# Altium PCB SV06.PcbDoc (part 1 of 3)
Units mil, origin at the board's own origin, x right, y up, seen from the top; angles counter-clockwise.
Board outline 3960.63 x 2763.78 mil, 2 copper layers (Top, Bottom), stack 12.7 mil thick; 211 components, 173 nets, 726 pads, 644 vias.
Unrouted connection lines stored in the file: 411.
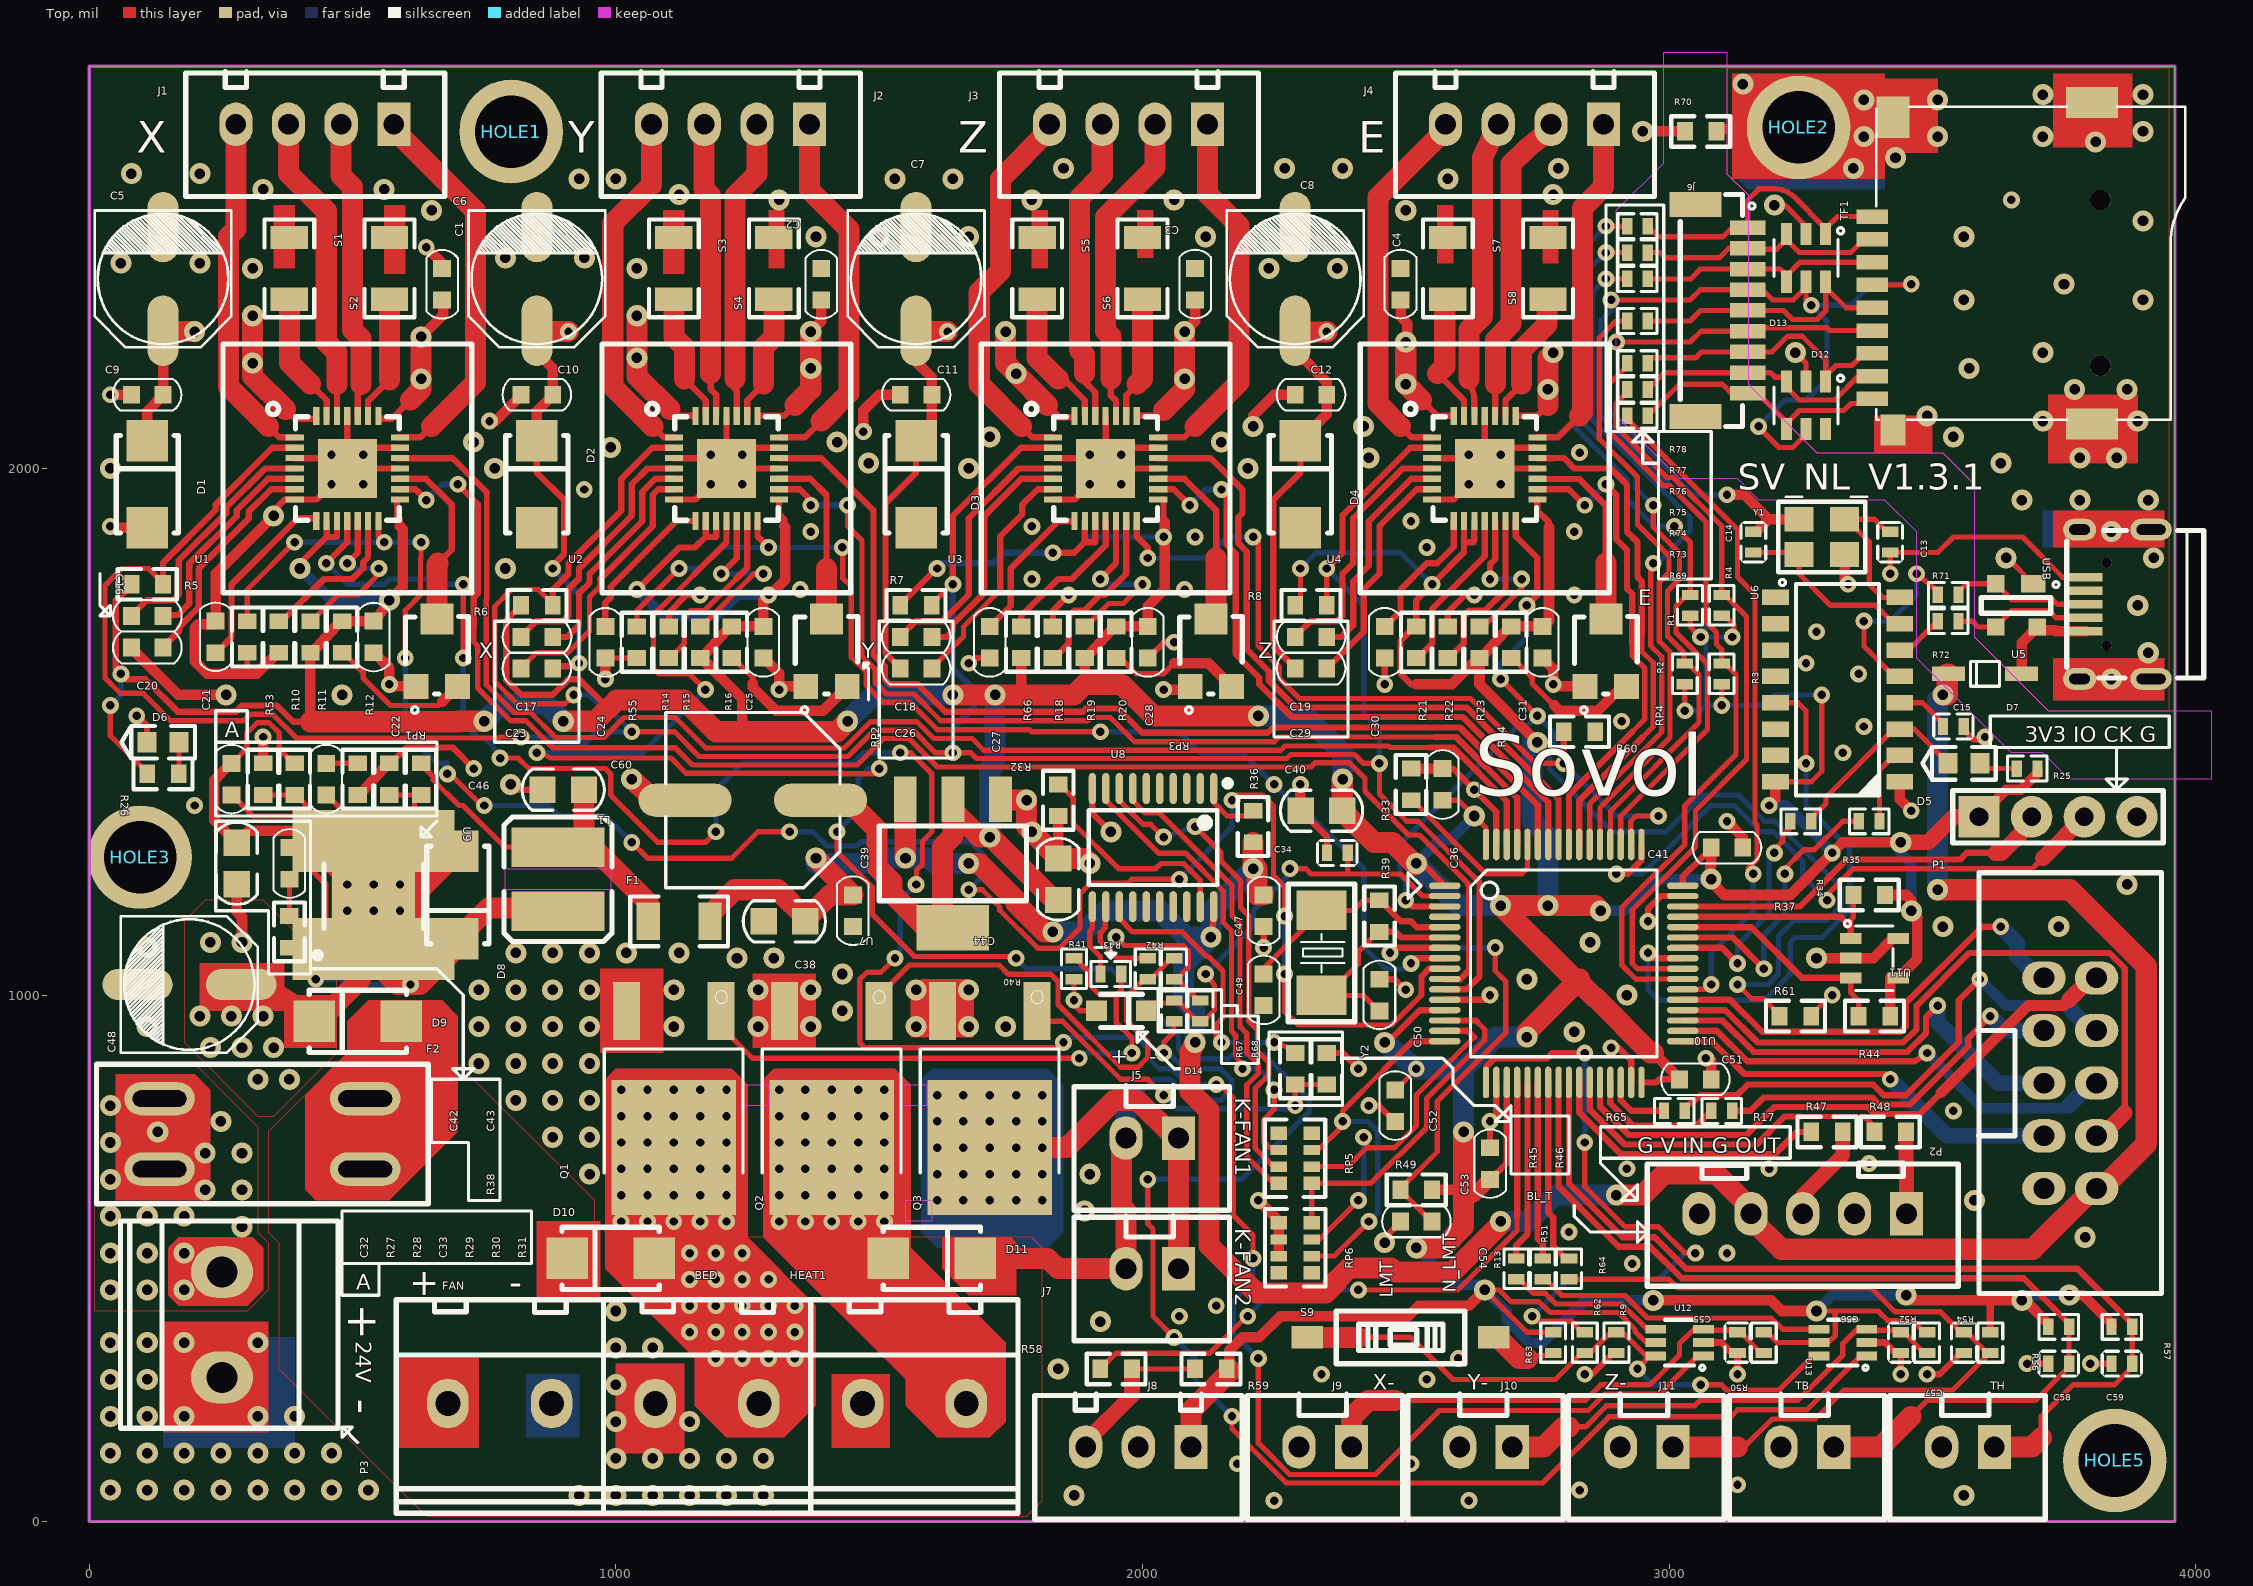
[diagram p0: Top view]
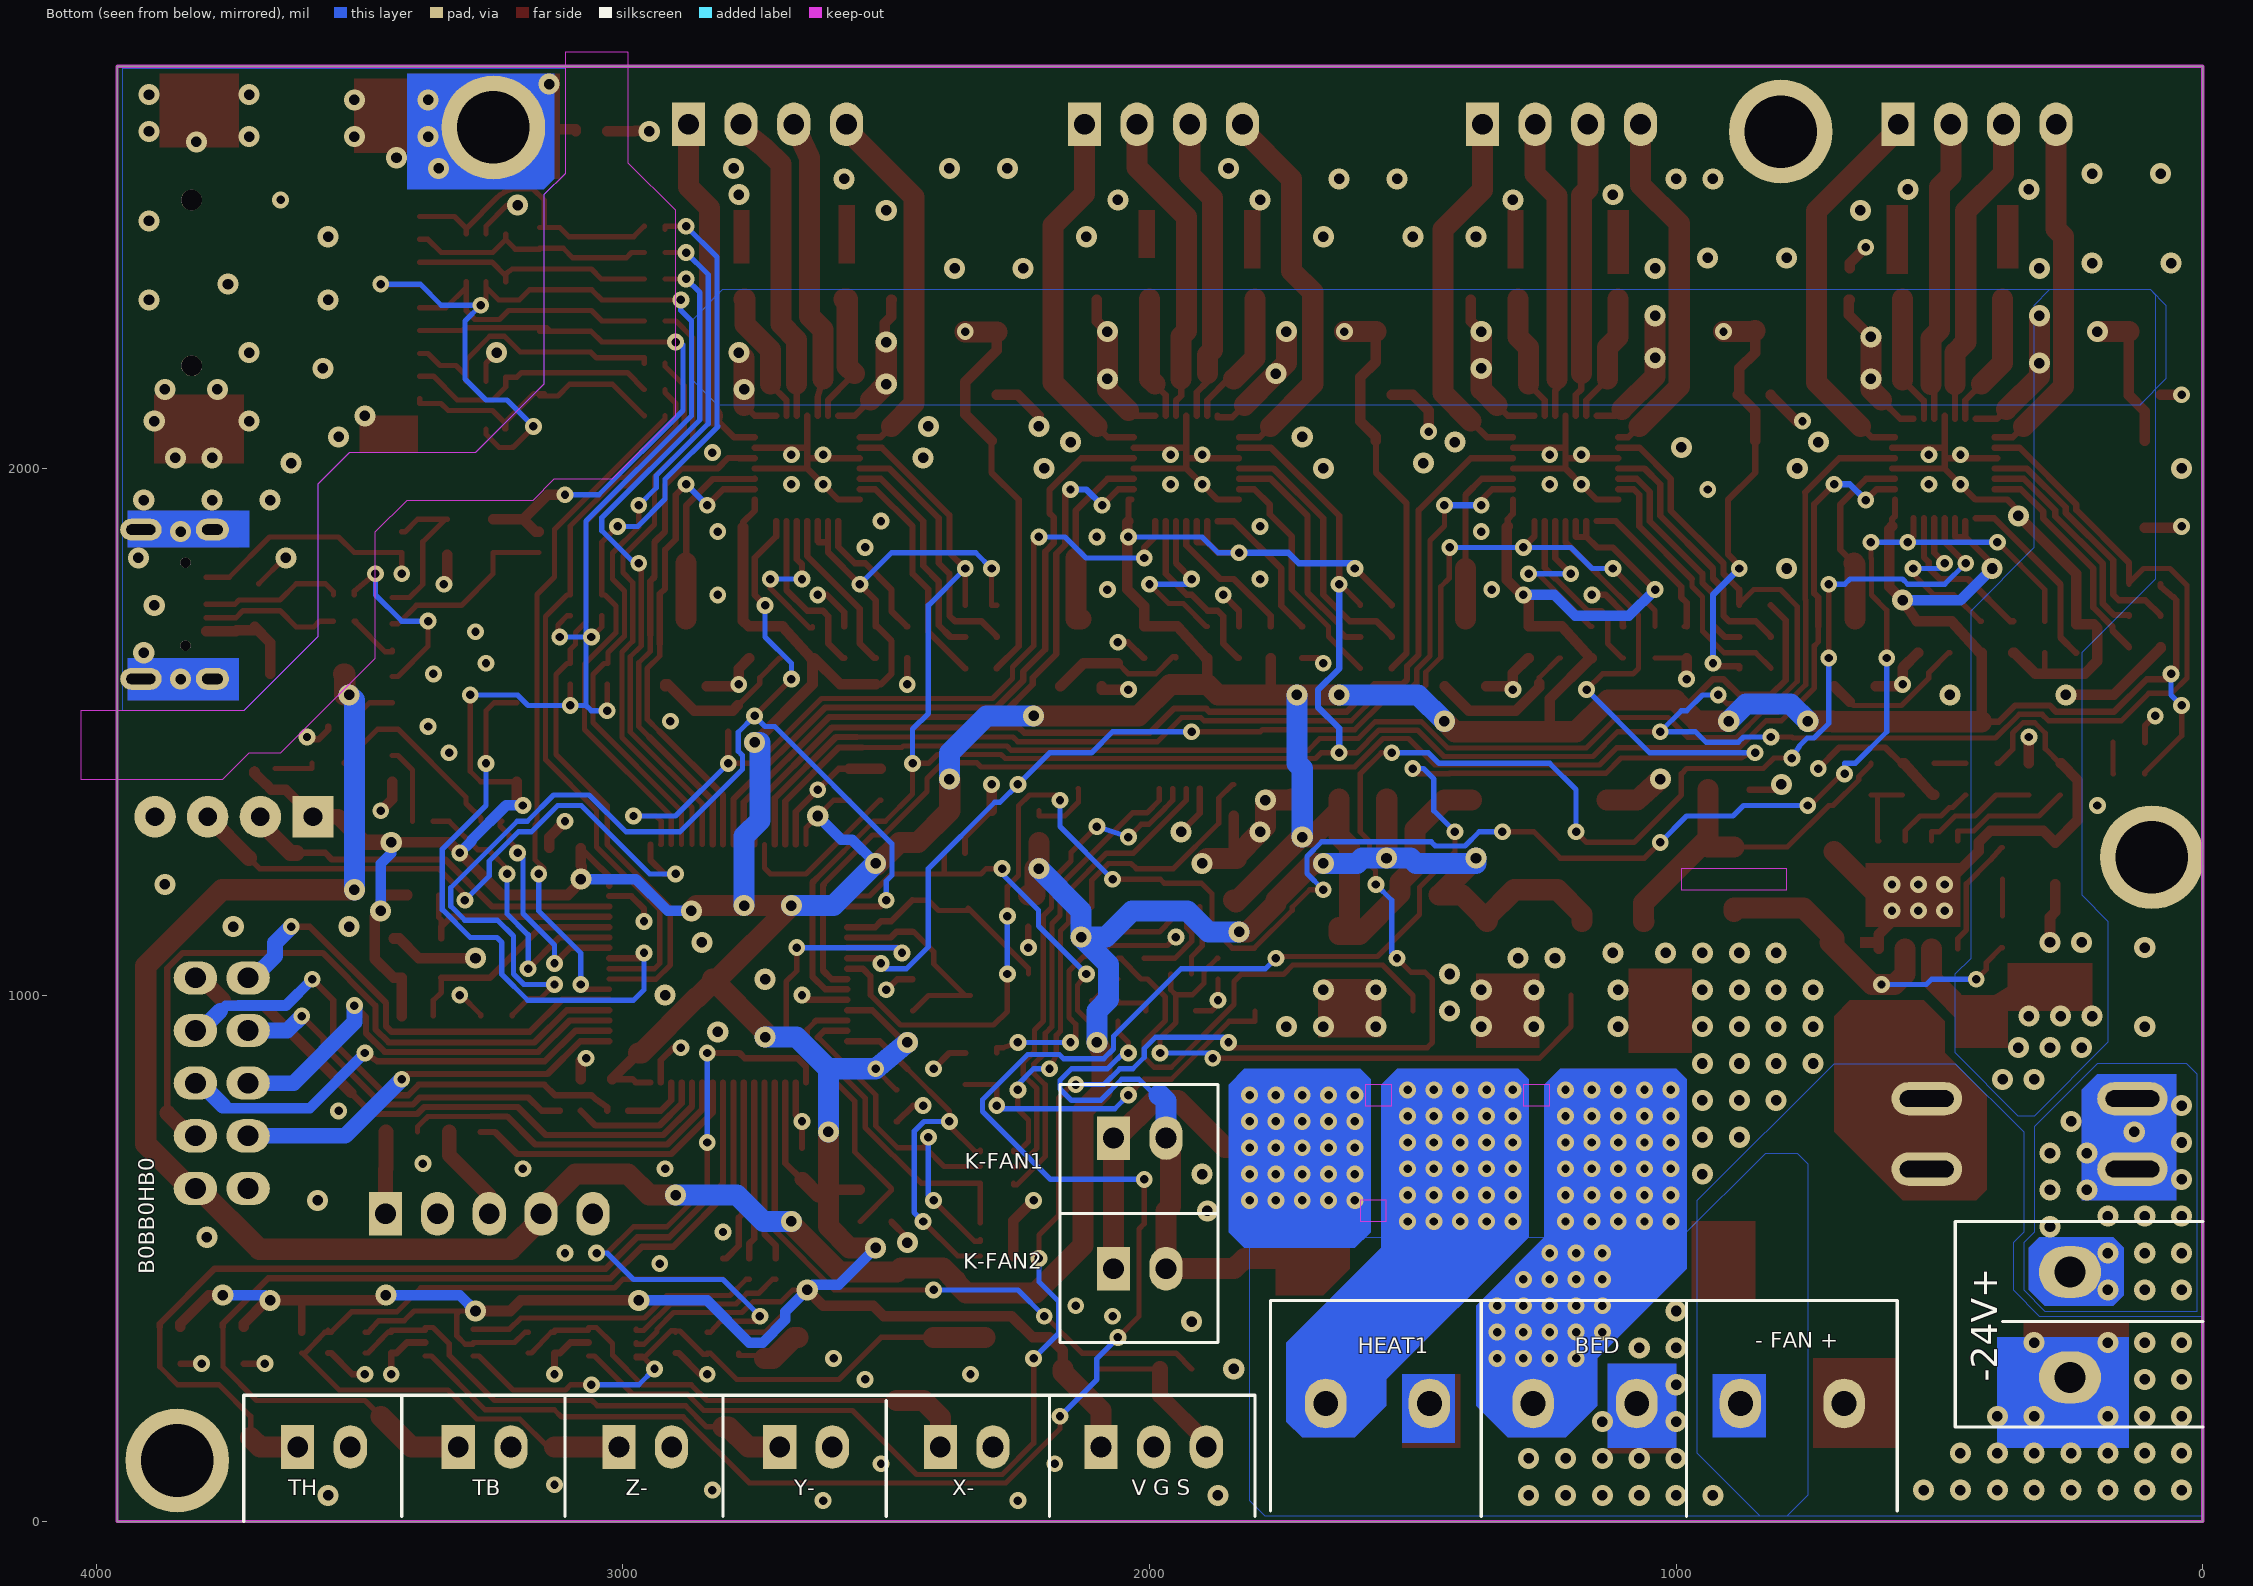
[diagram p1: Bottom view, seen from below]

## Layer stack, top to bottom
Solder Mask Top: solder mask 0.4, Solder Resist, Dk 3.5
Top: signal copper 1.35
Dielectric 1: dielectric 10, FR-4, Dk 4.3
Bottom: signal copper 1.35
Solder Mask Bottom: solder mask 0.4, Solder Resist, Dk 3.5

## Board outline
0,0 3960.63,0 3960.63,2763.78 0,2763.78

## Design rules (kind name [scope] priority, off if disabled: settings)
Clearance "Clearance - Default - DEFAULT- SMD" [IsVia vs IsSMTPin] p1: gap=6
Clearance "Clearance - Default - DEFAULT - Via" [IsVia vs IsVia] p2: gap=6
Clearance "Clearance - Default - DEFAULT - Net" [All] p3: gap=6 except(8: Arc-Fill Arc-Poly Arc-Region Track-Fill Track-Poly Track-Region SMDPad-Fill SMDPad-Poly SMDPad-Region THPad-Fill THPad-Poly THPad-Region Via-Fill Via-Poly Via-Region; 10: Fill-Fill Fill-Poly Fill-Region Poly-Poly Poly-Region Region-Region Text-Text)
ComponentClearance "ComponentClearance - Default - DEFAULT" [All] p1: gap=6 collisioncheckmode=3 verticalgap=10 showdistances=FALSE
FanoutControl Fanout_Small [(CompPinCount < 5)] p3: bgadir=Out bgaviamode=Centered fanoutstyle=Auto fanoutdirection=OutThenIn viagrid=1 // Fanout_Small (Default Rule)
FanoutControl Fanout_SOIC [IsSOIC] p4: bgadir=Out bgaviamode=Centered fanoutstyle=Auto fanoutdirection=Alternating viagrid=1 // Fanout_SOIC (Default Rule)
HoleToHoleClearance "HoleToHoleClearance - Default - DEFAULT" [All] p1: gap=6 allowstackedmicrovias=TRUE
Length "Default Length" [All] p1: maxlimit=50000 minlimit=0
MaxMinImpedance "Default Impedance" [All] p1: minimum=50.00 maximum=150.0
ParallelSegment "Default Parallel Segment Adjasent" [All] p1: limit=1000 gap=200
ParallelSegment "Default Parallel Segment Same Layer" [All] p2: limit=1000 gap=200
PlaneConnect "Default PlaneConnect" [All] p1: planeconnectstyle=Relief reliefexpansion=20 reliefentries=0 reliefconductorwidth=15 reliefairgap=10
PolygonConnect "PolygonConnect - Default SMT" [IsSMTPin] p1: connectstyle=Relief reliefconductorwidth=15 reliefentries=4 polygonreliefangle="90 Angle" airgapwidth=10
PolygonConnect "PolygonConnect - Default Pad" [All] p2: connectstyle=Relief reliefconductorwidth=15 reliefentries=4 polygonreliefangle="45 Angle" airgapwidth=10
RoutingLayers "RoutingLayers - Default - DEFAULT" [All] p1: top layer_v5=TRUE bottom layer_v5=TRUE
RoutingPriority "RoutingPriority - Default - DEFAULT" [All] p1: routingpriority=3
RoutingTopology "Default Routing Topology" [All] p1: topology=Shortest
RoutingVias "RoutingVias - Default - DEFAULT" [All] p1: holewidth=16 width=32 viastyle="Through Hole" minholewidth=16 minwidth=32 maxholewidth=16 maxwidth=32
SMDToCorner "SMDToCorner - Default - DEFAULT" [All] p1: distance=60000
SolderMaskExpansion [All] p1: expansion=4
Width "Default Width" [All] p1: maxlimit=250 minlimit=6 preferedwidth=12
22 further rules are at their usual default settings.

## Components (designator, comment, footprint, x,y, rotation, side; value= is the part's Value field where it differs from the comment)
BED "CONN-TH_2P-P5.00_WJ128V-5.0-2P_2X2.4_10" CONN-TH_2P-P5.00_WJ128V-5.0-2P_2X2.4_10 1173.23,224.41 r0 top
BL_T "2.54_XH-5A_SX_X_1_1.6_2.1" 2.54_XH-5A_SX_X_1_1.6_2.1 3253.94,584.65 r180 top
C1 "C0603" C0603 670,2350 r270 top
C2 "C0603" C0603 1390,2350 r270 top
C3 "C0603" C0603 2100,2350 r90 top
C4 "C0603" C0603 2490,2350 r90 top
C5 "ECAP_SMD_6D_X_1.5X3.4" ECAP_SMD_6D_X_1.5X3.4 140,2360 r180 top
C6 "ECAP_SMD_6D_X_1.5X3.4" ECAP_SMD_6D_X_1.5X3.4 850,2360 r180 top
C7 "ECAP_SMD_6D_X_1.5X3.4" ECAP_SMD_6D_X_1.5X3.4 1570,2360 r180 top
C8 "ECAP_SMD_6D_X_1.5X3.4" ECAP_SMD_6D_X_1.5X3.4 2290,2360 r180 top
C9 "C0603" C0603 110,2140 r180 top
C10 "C0603" C0603 850,2140 r180 top
C11 "C0603" C0603 1570,2140 r0 top
C12 "C0603" C0603 2320,2140 r0 top
C13 "C0402_LC" C0402_LC 3420,1860 r90 top
C14 "C0402_LC" C0402_LC 3160,1860 r90 top
C15 "C0402_LC" C0402_LC 3540,1510 r0 top
C16 "C0603" C0603 110,1720 r0 top
C17 "C0603" C0603 850,1680 r0 top
C18 "C0603" C0603 1570,1680 r0 top
C19 "C0603" C0603 2320,1680 r0 top
C20 "C0603" C0603 110,1660 r0 top
C21 "C0603" C0603 240,1680 r90 top
C22 "C0603" C0603 540,1680 r270 top
C23 "C0603" C0603 850,1620 r180 top
C24 "C0603" C0603 980,1670 r270 top
C25 "C0603" C0603 1280,1670 r270 top
C26 "C0603" C0603 1570,1620 r0 top
C27 "C0603" C0603 1710,1670 r270 top
C28 "C0603" C0603 2010,1670 r270 top
C29 "C0603" C0603 2320,1620 r0 top
C30 "C0603" C0603 2460,1670 r270 top
C31 "C0603" C0603 2760,1670 r270 top
C32 "C0603" C0603 270,1410 r90 top
C33 "C0603" C0603 450,1410 r90 top
C34 "C0402_LC" C0402_LC 2370,1270 r180 top
C36 "C0603" C0603 2570,1400 r270 top
C38 "C0805" C0805 1320,1140 r180 top
C39 "C0603" C0603 1450,1160 r90 top
C40 "C0805" C0805 2340,1350 r0 top
C41 "C0603" C0603 3110,1280 r180 top
C42 "C0805" C0805 280,1250 r90 top
C43 "C0603" C0603 380,1250 r270 top
C44 "C0805" C0805 1840,1220 r90 top
C46 "C0805" C0805 900,1390 r180 top
C47 "C0603" C0603 2230,1160 r270 top
C48 "ECAP_SMD_6D_X_1.5X3.4" ECAP_SMD_6D_X_1.5X3.4 190,1020 r270 top
C49 "C0603" C0603 2230,1010 r270 top
C50 "C0603" C0603 2450,1000 r90 top
C51 "C0603" C0603 3050,840 r180 top
C52 "C0603" C0603 2480,790 r90 top
C53 "C0603" C0603 2660,680 r270 top
C54 "C0603" C0603 2520,570 r0 top
C55 "C0402_LC" C0402_LC 3130,340 r90 top
C56 "C0402_LC" C0402_LC 3440,340 r90 top
C57 "C0402_LC" C0402_LC 3560,340 r90 top
C58 "C0402_LC" C0402_LC 3740,300 r180 top
C59 "C0402_LC" C0402_LC 3860,300 r180 top
C60 "CAP-SMD_BD8.0-L8.3-W8.3-FD_2" CAP-SMD_BD8.0-L8.3-W8.3-FD_2 1260,1370 r180 top
D1 "LC-SMA(DO-214AC)_S1" LC-SMA(DO-214AC)_S1 110,1970 r270 top
D2 "LC-SMA(DO-214AC)_S1" LC-SMA(DO-214AC)_S1 850,1970 r270 top
D3 "LC-SMA(DO-214AC)_S1" LC-SMA(DO-214AC)_S1 1570,1970 r270 top
D4 "LC-SMA(DO-214AC)_S1" LC-SMA(DO-214AC)_S1 2300,1970 r270 top
D5 "LC-0603_LED_S3" LC-0603_LED_S3 3560,1440 r0 top
D6 "LC-0603_LED_S3" LC-0603_LED_S3 140,1480 r0 top
D7 "WH-SOD-123" WH-SOD-123 3600,1610 r0 top
D8 "LC-SMA(DO-214AC)_S1" LC-SMA(DO-214AC)_S1 700,1190 r90 top
D9 "LC-SMA(DO-214AC)_S1" LC-SMA(DO-214AC)_S1 510,950 r0 top
D10 "LC-SMA(DO-214AC)_S1" LC-SMA(DO-214AC)_S1 990,500 r0 top
D11 "LC-SMA(DO-214AC)_S1" LC-SMA(DO-214AC)_S1 1600,500 r180 top
D12 "SOT-23-6_L2.9-W1.6-P0.95-LS2.8-BL_2" SOT-23-6_L2.9-W1.6-P0.95-LS2.8-BL_2 3260,2120 r180 top
D13 "SOT-23-6_L2.9-W1.6-P0.95-LS2.8-BL_2" SOT-23-6_L2.9-W1.6-P0.95-LS2.8-BL_2 3260,2400 r180 top
D14 "SOD-323_L1.8-W1.3-LS2.5-RD" SOD-323_L1.8-W1.3-LS2.5-RD 1960,970 r180 top
F1 "LC-1206_R" LC-1206_R 1120,1140 r0 top
F2 "Z-506B" Z-506B 328.74,736.22 r0 top
FAN "CONN-TH_2P-P5.00_WJ128V-5.0-2P_2X2.4_10" CONN-TH_2P-P5.00_WJ128V-5.0-2P_2X2.4_10 779.53,224.41 r0 top
HEAT1 "CONN-TH_2P-P5.00_WJ128V-5.0-2P_2X2.4_10" CONN-TH_2P-P5.00_WJ128V-5.0-2P_2X2.4_10 1566.93,224.41 r0 top
HOLE1 "MACH3.5_5" MACH3.5_5 801.18,2639.76 r0 top
HOLE2 "MACH3.5_5" MACH3.5_5 3246.06,2647.64 r0 top
HOLE3 "MACH3.5_5" MACH3.5_5 96.46,1261.81 r0 top
HOLE5 "MACH3.5_5" MACH3.5_5 3846.46,116.14 r0 top
J1 "2.54_XH-4A_SX_X_1_1.6_2.1" 2.54_XH-4A_SX_X_1_1.6_2.1 478.35,2653.54 r180 top
J2 "2.54_XH-4A_SX_X_1_1.6_2.1" 2.54_XH-4A_SX_X_1_1.6_2.1 1267.72,2653.54 r180 top
J3 "2.54_XH-4A_SX_X_1_1.6_2.1" 2.54_XH-4A_SX_X_1_1.6_2.1 2023.62,2653.54 r180 top
J4 "2.54_XH-4A_SX_X_1_1.6_2.1" 2.54_XH-4A_SX_X_1_1.6_2.1 2775.59,2653.54 r180 top
J5 "2.54_XH-2A_SX_X_1_1.6_2.1" 2.54_XH-2A_SX_X_1_1.6_2.1 1968.5,728.35 r180 top
J6 "CONN-SMD_9P-P1.00_HCTL_HC-1.0-9PL_2" CONN-SMD_9P-P1.00_HCTL_HC-1.0-9PL_2 3100,2300 r270 top
J7 "2.54_XH-2A_SX_X_1_1.6_2.1" 2.54_XH-2A_SX_X_1_1.6_2.1 1968.5,480.31 r180 top
J8 "2.54_XH-3A_SX_1_1.6_2.1" 2.54_XH-3A_SX_1_1.6_2.1 1992.13,141.73 r180 top
J9 "2.54_XH-2A_SX_X_1_1.6_2.1" 2.54_XH-2A_SX_X_1_1.6_2.1 2297.24,141.73 r180 top
J10 "2.54_XH-2A_SX_X_1_1.6_2.1" 2.54_XH-2A_SX_X_1_1.6_2.1 2602.36,141.73 r180 top
J11 "2.54_XH-2A_SX_X_1_1.6_2.1" 2.54_XH-2A_SX_X_1_1.6_2.1 2907.48,141.73 r180 top
L1 "IND-SMD_L4.5-W4.0" IND-SMD_L4.5-W4.0 890,1220 r90 top
P1 "SIP-4P_X" SIP-4P_X 3588.58,1338.58 r0 top
P2 "IDC-TH_10P-P2.54_1X2.1X1.6" IDC-TH_10P-P2.54_1X2.1X1.6 3761.81,832.68 r270 top
P3 "CONN-TH_2P-P5.00_WJ129V-5.00-2P_2.5X3" CONN-TH_2P-P5.00_WJ129V-5.00-2P_2.5X3 251.97,374.02 r90 top
Q1 "TO-252-2_L6.6-W6.1-P4.57-LS9.9-TL-CW_1" TO-252-2_L6.6-W6.1-P4.57-LS9.9-TL-CW_1 1110,840 r270 top
Q2 "TO-252-2_L6.6-W6.1-P4.57-LS9.9-TL-CW_1" TO-252-2_L6.6-W6.1-P4.57-LS9.9-TL-CW_1 1410,840 r270 top
Q3 "TO-252-2_L6.6-W6.1-P4.57-LS9.9-TL-CW_1" TO-252-2_L6.6-W6.1-P4.57-LS9.9-TL-CW_1 1710,840 r270 top
R1 "R0402_LC" R0402_LC 3040,1740 r270 top
R2 "R0402_LC" R0402_LC 3030,1610 r270 top
R3 "R0402_LC" R0402_LC 3100,1610 r270 top
R4 "R0402_LC" R0402_LC 3100,1740 r270 top
R5 "R0603" R0603 110,1780 r180 top
R6 "R0603" R0603 850,1740 r180 top
R7 "R0603" R0603 1570,1740 r180 top
R8 "R0603" R0603 2320,1740 r180 top
R9 "R0402_LC" R0402_LC 2900,340 r90 top
R10 "R0603" R0603 360,1680 r270 top
R11 "R0603" R0603 420,1680 r270 top
R12 "R0603" R0603 480,1680 r90 top
R13 "R0402_LC" R0402_LC 2710,480 r90 top
R14 "R0603" R0603 1100,1670 r90 top
R15 "R0603" R0603 1160,1670 r270 top
R16 "R0603" R0603 1220,1670 r90 top
R17 "R0402_LC" R0402_LC 3100,780 r0 top
R18 "R0603" R0603 1830,1670 r90 top
R19 "R0603" R0603 1890,1670 r270 top
R20 "R0603" R0603 1950,1670 r90 top
R21 "R0603" R0603 2520,1670 r90 top
R22 "R0603" R0603 2580,1670 r90 top
R23 "R0603" R0603 2640,1670 r270 top
R24 "R0603" R0603 2700,1670 r90 top
R25 "R0402_LC" R0402_LC 3680,1430 r0 top
R26 "R0603" R0603 140,1420 r180 top
R27 "R0603" R0603 330,1410 r90 top
R28 "R0603" R0603 390,1410 r270 top
R29 "R0603" R0603 510,1410 r90 top
R30 "R0603" R0603 570,1410 r270 top
R31 "R0603" R0603 630,1410 r90 top
R32 "R0603" R0603 1840,1370 r270 top
R33 "R0603" R0603 2510,1400 r90 top
R34 "R0402_LC" R0402_LC 3250,1330 r180 top
R35 "R0402_LC" R0402_LC 3380,1330 r180 top
R36 "R0603" R0603 2210,1320 r90 top
R37 "R0603" R0603 3380,1190 r180 top
R38 "R0603" R0603 380,1120 r270 top
R39 "R0603" R0603 2450,1150 r90 top
R40 "R0402_LC" R0402_LC 1870,1050 r270 top
R41 "R0402_LC" R0402_LC 1940,1040 r0 top
R42 "R0402_LC" R0402_LC 2060,1050 r270 top
R43 "R0402_LC" R0402_LC 2010,1050 r270 top
R44 "R0603" R0603 3390,960 r180 top
R45 "R0603" R0603 2290,860 r270 top
R46 "R0603" R0603 2350,860 r90 top
R47 "R0603" R0603 3300,740 r0 top
R48 "R0603" R0603 3420,740 r0 top
R49 "R0603" R0603 2520,630 r0 top
R50 "R0402_LC" R0402_LC 3180,340 r90 top
R51 "R0402_LC" R0402_LC 2760,480 r90 top
R52 "R0402_LC" R0402_LC 3490,340 r90 top
R53 "R0603" R0603 300,1680 r270 top
R54 "R0402_LC" R0402_LC 3610,340 r90 top
R55 "R0603" R0603 1040,1670 r270 top
R56 "R0402_LC" R0402_LC 3740,370 r180 top
R57 "R0402_LC" R0402_LC 3860,370 r180 top
R58 "R0603" R0603 1950,290 r0 top
R59 "R0603" R0603 2130,290 r0 top
R60 "R0603" R0603 2830,1500 r0 top
R61 "R0603" R0603 3240,960 r0 top
R62 "R0402_LC" R0402_LC 2840,340 r90 top
R63 "R0402_LC" R0402_LC 2780,340 r90 top
R64 "R0402_LC" R0402_LC 2810,480 r270 top
R65 "R0402_LC" R0402_LC 3010,780 r180 top
R66 "R0603" R0603 1770,1670 r270 top
R67 "R0402_LC" R0402_LC 2060,970 r270 top
R68 "R0402_LC" R0402_LC 2110,970 r270 top
R69 "R0402_LC" R0402_LC 2940,2100 r180 top
R70 "R0603" R0603 3060,2640 r180 top
R71 "R0402_LC" R0402_LC 3530,1760 r180 top
R72 "R0402_LC" R0402_LC 3530,1710 r180 top
R73 "R0402_LC" R0402_LC 2940,2150 r180 top
R74 "R0402_LC" R0402_LC 2940,2200 r180 top
R75 "R0402_LC" R0402_LC 2940,2280 r180 top
R76 "R0402_LC" R0402_LC 2940,2360 r180 top
R77 "R0402_LC" R0402_LC 2940,2410 r180 top
R78 "R0402_LC" R0402_LC 2940,2460 r180 top
RP1 "RES-ADJ-SMD_3P-L3.0-W3.8-P1.75-BR" RES-ADJ-SMD_3P-L3.0-W3.8-P1.75-BR 660,1650 r270 top
RP2 "RES-ADJ-SMD_3P-L3.0-W3.8-P1.75-BR" RES-ADJ-SMD_3P-L3.0-W3.8-P1.75-BR 1400,1650 r270 top
RP3 "RES-ADJ-SMD_3P-L3.0-W3.8-P1.75-BR" RES-ADJ-SMD_3P-L3.0-W3.8-P1.75-BR 2130,1650 r270 top
RP4 "RES-ADJ-SMD_3P-L3.0-W3.8-P1.75-BR" RES-ADJ-SMD_3P-L3.0-W3.8-P1.75-BR 2880,1650 r270 top
RP5 "RES-ARRAY-SMD_0603-8P-L3.2-W1.6-BL" RES-ARRAY-SMD_0603-8P-L3.2-W1.6-BL 2290,690 r90 top
RP6 "RES-ARRAY-SMD_0603-8P-L3.2-W1.6-BL" RES-ARRAY-SMD_0603-8P-L3.2-W1.6-BL 2290,520 r270 top
S1 "LC-1206_R" LC-1206_R 380,2380 r270 top
S2 "LC-1206_R" LC-1206_R 570,2380 r270 top
S3 "LC-1206_R" LC-1206_R 1110,2380 r270 top
S4 "LC-1206_R" LC-1206_R 1300,2380 r270 top
S5 "LC-1206_R" LC-1206_R 1800,2380 r270 top
S6 "LC-1206_R" LC-1206_R 2000,2380 r270 top
S7 "LC-1206_R" LC-1206_R 2580,2380 r270 top
S8 "LC-1206_R" LC-1206_R 2770,2380 r270 top
S9 "SW-SMD_2P-L6.2-W2.5-LS9.8_1" SW-SMD_2P-L6.2-W2.5-LS9.8_1 2490,350 r0 top
TB "2.54_XH-2A_SX_X_1_1.6_2.1" 2.54_XH-2A_SX_X_1_1.6_2.1 3212.6,141.73 r180 top
TF1 "TF-09PIN" TF-09PIN 3948.82,2352.36 r90 top
TH "2.54_XH-2A_SX_X_1_1.6_2.1" 2.54_XH-2A_SX_X_1_1.6_2.1 3517.72,141.73 r180 top
U1 "WH-QFN-28_5X5X05P_9JR" WH-QFN-28_5X5X05P_9JR 490,2000 r0 top
U2 "WH-QFN-28_5X5X05P_9JR" WH-QFN-28_5X5X05P_9JR 1210,2000 r0 top
U3 "WH-QFN-28_5X5X05P_9JR" WH-QFN-28_5X5X05P_9JR 1930,2000 r0 top
U4 "WH-QFN-28_5X5X05P_9JR" WH-QFN-28_5X5X05P_9JR 2650,2000 r0 top
U5 "SOT-143-4_L2.9-W1.3-P1.92-LS2.3-BL_6" SOT-143-4_L2.9-W1.3-P1.92-LS2.3-BL_6 3660,1740 r180 top
U6 "SOP-16" SOP-16 3320,1580 r90 top
U7 "SOT-223_L6.7-W3.5-P2.30-BR" SOT-223_L6.7-W3.5-P2.30-BR 1640,1250 r90 top
U8 "LC-TSSOP-20" LC-TSSOP-20 2020,1280 r180 top
U9 "LC-SOIC-8_EP_150MIL" LC-SOIC-8_EP_150MIL 540,1190 r0 top
U10 "QFP64$2F$12$2F$0.5" QFP64$2F$12$2F$0.5 2800,1060 r270 top
U11 "TSOT-23-5_L2.9-W1.6-P0.95-LS2.8-BL" TSOT-23-5_L2.9-W1.6-P0.95-LS2.8-BL 3390,1070 r270 top
U12 "SC-70-6_L2.1-W1.3-P0.65-LS2.3-BR_X" SC-70-6_L2.1-W1.3-P0.65-LS2.3-BR_X 3020,340 r0 top
U13 "SC-70-6_L2.1-W1.3-P0.65-LS2.3-BR_X" SC-70-6_L2.1-W1.3-P0.65-LS2.3-BR_X 3330,340 r0 top
USB "MICROUSB_DIP_0.81" MICROUSB_DIP_0.81 3915.35,1742.13 r0 top
Y1 "OSC-SMD_4P-L3.2-W2.5-BL_X" OSC-SMD_4P-L3.2-W2.5-BL_X 3290,1870 r0 top
Y2 "OSC-SMD_L5.0-W3.2" OSC-SMD_L5.0-W3.2 2340,1080 r90 top

## Footprints (in the part's own frame and the unit in brackets; to place one, negate y for a bottom-side part, rotate by r counter-clockwise, add the part's x,y. Pads: shape width x height; smd on the part's side, far side on the other; paste and mask are expansions set on the pad)
2.54_XH-2A_SX_X_1_1.6_2.1 [mm]
  rect 1.6x2.1 / inner oval 1.6x2.1 / far side rect 1.6x2.1 hole 1: 1(-2.54,0)
  oval 1.6x2.1 hole 1: 2(0,0)
  silkscreen extent -5,-2.54 2.5,3.48
2.54_XH-3A_SX_1_1.6_2.1 [mm]
  rect 1.6x2.1 / inner oval 1.6x2.1 / far side rect 1.6x2.1 hole 1: 1(-2.54,0)
  oval 1.6x2.1 hole 1: 2(0,0) 3(2.54,0)
  silkscreen extent -5,-2.54 5,3.48
2.54_XH-4A_SX_X_1_1.6_2.1 [mm]
  rect 1.6x2.1 / inner oval 1.6x2.1 / far side rect 1.6x2.1 hole 1: 1(-2.54,0)
  oval 1.6x2.1 hole 1: 2(0,0) 3(2.54,0) 4(5.08,0)
  silkscreen extent -5,-2.54 7.5,3.48
2.54_XH-5A_SX_X_1_1.6_2.1 [mm]
  rect 1.6x2.1 / inner oval 1.6x2.1 / far side rect 1.6x2.1 hole 1: 1(-5,0)
  oval 1.6x2.1 hole 1: 2(-2.5,0) 3(0,0) 4(2.5,0) 5(5,0)
  silkscreen extent -7.5,-2.44 7.5,3.5
C0402_LC [mm]
  rect 0.5x0.8 smd: 1(-0.5,0) 2(0.5,0)
  silkscreen extent -0.95,-0.6 0.95,0.6
C0603 [mil]
  rect 32x34 smd: 1(-30,0) 2(30,0)
  silkscreen extent -65,-30 65,30
C0805 [mm]
  rect 1.27x1.27 smd: 1(-1,0) 2(1,0)
  silkscreen extent -1.98,-0.99 1.99,0.99
CAP-SMD_BD8.0-L8.3-W8.3-FD_2 [mm]
  oval 4.5x1.6 smd: 1(-3.267,0) 2(3.267,0)
  silkscreen extent -4.2,-4.23 4.2,4.23
CONN-SMD_9P-P1.00_HCTL_HC-1.0-9PL_2 [mm]
  rect 0.7x1.71 smd: 1(-4,1.258) 2(-3,1.258) 3(-2,1.258) 4(-1,1.258) 5(0,1.258) 6(1,1.258) 7(2,1.258) 8(3,1.258) 9(4,1.258)
  rect 1.2x2.5 smd: 10(5.11,-1.257) 11(-5.11,-1.258)
  silkscreen extent -5.6,-2 5.6,1.61
CONN-TH_2P-P5.00_WJ128V-5.0-2P_2X2.4_10 [mm]
  oval 2x2.4 hole 1.2: 1(-2.5,0) 2(2.5,0)
  silkscreen extent -5,-5.3 5,5
CONN-TH_2P-P5.00_WJ129V-5.00-2P_2.5X3 [mm]
  oval 2.5x3 hole 1.5: 1(-2.54,0) 2(2.54,0)
  silkscreen extent -5.01,-5.6 5,4.9
ECAP_SMD_6D_X_1.5X3.4 [mm]
  oval 1.5x3.4 smd: 1(0,2.5) 2(0,-2.5)
  silkscreen extent -3.3,-3.3 3.3,3.3
IDC-TH_10P-P2.54_1X2.1X1.6 [mm]
  oval 1.6x2.1 hole 1: 1(-5.08,-1.27) 2(-5.08,1.27) 3(-2.54,-1.27) 4(-2.54,1.27) 5(0,-1.27) 6(0,1.27) 7(2.54,-1.27) 8(2.54,1.27) 9(5.08,-1.27) 10(5.08,1.27)
  silkscreen extent -10.15,-4.45 10.15,4.4
IND-SMD_L4.5-W4.0 [mm]
  rect 1.9x4.5 smd: 1(-1.55,0) 2(1.55,0)
  silkscreen extent -3,-2.6 3,2.6
LC-0603_LED_S3 [mm]
  rect 0.93x0.98 smd: 1(-0.77,0) 2(0.77,0)
  silkscreen extent -2,-0.79 1.54,0.79
LC-1206_R [mm]
  rect 1.13x1.8 smd: 1(-1.49,0) 2(1.49,0)
  silkscreen extent -2.36,-1.2 2.35,1.2
LC-SMA(DO-214AC)_S1 [mm]
  rrect0% 2x2 smd: 1(-2.1,0) 2(2.1,0)
  silkscreen extent -2.35,-1.5 2.35,1.5
LC-SOIC-8_EP_150MIL [mm]
  rect 4x3 smd: 0(0,0) 1(-1.905,-2.6) 2(-0.635,-2.6) 3(0.635,-2.6) 4(1.905,-2.6) 5(1.905,2.6) 6(0.635,2.6) 7(-0.635,2.6) 8(-1.905,2.6)
  silkscreen extent -2.85,-3.05 2.4,1.5
LC-TSSOP-20 [mm]
  oval 0.35x1.5 smd: 1(-2.925,-2.85) 2(-2.275,-2.85) 3(-1.625,-2.85) 4(-0.975,-2.85) 5(-0.325,-2.85) 6(0.325,-2.85) 7(0.975,-2.85) 8(1.625,-2.85) 9(2.275,-2.85) 10(2.925,-2.85) 11(2.925,2.85) 12(2.275,2.85) 13(1.625,2.85) 14(0.975,2.85) 15(0.325,2.85) 16(-0.325,2.85) 17(-0.975,2.85) 18(-1.625,2.85) 19(-2.275,2.85) 20(-2.925,2.85)
  silkscreen extent -3.75,-3.25 3.1,1.8
MACH3.5_5 [mm]
  round 5 hole 3.5: 1(0,0)
MICROUSB_DIP_0.81 [mm]
  rect 1.6x0.4 smd: 1(-3.15,1.3) 2(-3.15,0.65) 3(-3.15,0) 4(-3.15,-0.65) 5(-3.15,-1.3)
  oval 1.6x1.05 hole 0.5 slot 1 at 0 deg: 6(-3.45,-3.6) 9(-3.45,3.6)
  oval 2x1.05 hole 0.5 slot 1.4 at 0 deg: 7(0,-3.6) 8(0,3.6)
  round 0.5 hole 0.5: 10(-2.15,-2) 11(-2.15,2)
  silkscreen extent -4.06,-3.56 2.54,3.56
OSC-SMD_4P-L3.2-W2.5-BL_X [mm]
  rect 1.4x1.2 smd: 1(-1.1,-0.85) 2(1.1,-0.85) 3(1.1,0.85) 4(-1.1,0.85)
  silkscreen extent -2.1,-2.35 2.1,1.7
OSC-SMD_L5.0-W3.2 [mm]
  rect 1.9x2.4 smd: 1(-2.05,0) 2(2.05,0)
  silkscreen extent -3.32,-1.6 3.33,1.6
QFP64$2F$12$2F$0.5 [mil]
  oval 12x60 smd: 1(-147.64,-225.91) 2(-127.95,-225.91) 3(-108.27,-225.91) 4(-88.58,-225.91) 5(-68.9,-225.91) 6(-49.21,-225.91) 7(-29.53,-225.91) 8(-9.84,-225.91) 9(9.84,-225.91) 10(29.53,-225.91) 11(49.21,-225.91) 12(68.9,-225.91) 13(88.58,-225.91) 14(108.27,-225.91) 15(127.95,-225.91) 16(147.64,-225.91) 33(147.64,225.91) 34(127.95,225.91) 35(108.27,225.91) 36(88.58,225.91) 37(68.9,225.91) 38(49.21,225.91) 39(29.53,225.91) 40(9.84,225.91) 41(-9.84,225.91) 42(-29.53,225.91) 43(-49.21,225.91) 44(-68.9,225.91) 45(-88.58,225.91) 46(-108.27,225.91) 47(-127.95,225.91) 48(-147.64,225.91)
  oval 60x12 smd: 17(225.91,-147.64) 18(225.91,-127.95) 19(225.91,-108.27) 20(225.91,-88.58) 21(225.91,-68.9) 22(225.91,-49.21) 23(225.91,-29.53) 24(225.91,-9.84) 25(225.91,9.84) 26(225.91,29.53) 27(225.91,49.21) 28(225.91,68.9) 29(225.91,88.58) 30(225.91,108.27) 31(225.91,127.95) 32(225.91,147.64) 49(-225.91,147.64) 50(-225.91,127.95) 51(-225.91,108.27) 52(-225.91,88.58) 53(-225.91,68.9) 54(-225.91,49.21) 55(-225.91,29.53) 56(-225.91,9.84) 57(-225.91,-9.84) 58(-225.91,-29.53) 59(-225.91,-49.21) 60(-225.91,-68.9) 61(-225.91,-88.58) 62(-225.91,-108.27) 63(-225.91,-127.95) 64(-225.91,-147.64)
  silkscreen extent -177,-296 177,177
R0402_LC [mm]
  rect 0.5x0.8 smd: 1(-0.5,0) 2(0.5,0)
  silkscreen extent -0.95,-0.6 0.95,0.6
R0603 [mil]
  rect 30x35 smd: 1(-30,0) 2(30,0)
  silkscreen extent -56,-29 56,29
RES-ADJ-SMD_3P-L3.0-W3.8-P1.75-BR [mm]
  rrect0% 1.2x1.2 smd: 1(1.625,-1) 3(1.625,1)
  rect 1.5x1.6 smd: 2(-1.625,0)
  silkscreen extent -1.75,-1.51 2.92,1.51
RES-ARRAY-SMD_0603-8P-L3.2-W1.6-BL [mm]
  rect 0.65x0.8 smd: 1(-1.2,-0.8) 4(1.2,-0.8) 5(1.2,0.8) 8(-1.2,0.8)
  rect 0.5x0.8 smd: 2(-0.4,-0.8) 3(0.4,-0.8) 6(0.4,0.8) 7(-0.4,0.8)
  silkscreen extent -1.87,-1.45 1.87,1.47
SC-70-6_L2.1-W1.3-P0.65-LS2.3-BR_X [mm]
  rect 1x0.42 smd: 1(1.15,-0.65) 2(1.15,0) 3(1.15,0.65) 4(-1.15,0.65) 5(-1.15,0) 6(-1.15,-0.65)
  silkscreen extent -0.7,-1.34 1.21,1.1
SIP-4P_X [mm]
  rect 2x2 / inner round 2 / far side rect 2x2 hole 0.9: 1(0,0)
  round 2 hole 0.9: 2(2.54,0) 3(5.08,0) 4(7.62,0)
  silkscreen extent -1.27,-1.27 8.89,1.27
SOD-323_L1.8-W1.3-LS2.5-RD [mm]
  rect 1x1 smd: 1(-1.2,0) 2(1.2,0)
  silkscreen extent -1,-0.8 1,0.8
SOP-16 [mm]
  rect 0.75x1.3 smd: 1(-4.445,-3) 2(-3.175,-3) 3(-1.905,-3) 4(-0.635,-3) 5(0.635,-3) 6(1.905,-3) 7(3.175,-3) 8(4.445,-3) 9(4.445,3) 10(3.175,3) 11(1.905,3) 12(0.635,3) 13(-0.635,3) 14(-1.905,3) 15(-3.175,3) 16(-4.445,3)
  silkscreen extent -5.1,-2 5.1,2
SOT-23-6_L2.9-W1.6-P0.95-LS2.8-BL_2 [mm]
  rect 0.532x1.072 smd: 1(-0.95,-1.149) 2(0,-1.149) 3(0.95,-1.149) 4(0.95,1.149) 5(0,1.149) 6(-0.95,1.149)
  silkscreen extent -1.82,-1.45 1.54,0.89
SOT-143-4_L2.9-W1.3-P1.92-LS2.3-BL_6 [mil]
  rect 47x33 smd: 1(-31.5,-41)
  rect 33x33 smd: 2(39.5,-41) 3(39.5,41) 4(-39.5,41)
  silkscreen extent -80,-45 67,15
SOT-223_L6.7-W3.5-P2.30-BR [mm]
  rect 2.2x1.1 smd: 1(3.099,-2.3) 2(3.099,0) 3(3.099,2.3)
  rect 2.2x3.5 smd: 4(-3.099,0)
  silkscreen extent -1.8,-3.55 1.8,3.55
SW-SMD_2P-L6.2-W2.5-LS9.8_1 [mm]
  rect 1.5x1.1 smd: 1(-4.5,0) 2(4.5,0)
  silkscreen extent -3.1,-1.27 3.1,1.27
TF-09PIN [mm]
  rect 0.7x1.5 smd: 1(3.2,14.3) 2(2.1,14.3) 3(1,14.3) 4(-0.1,14.3) 5(-1.2,14.3) 6(-2.3,14.3) 7(-3.4,14.3) 8(-4.5,14.3) 9(-5.588,14.3)
  rect 1.5x1.2 smd: 10(-7.1,13.3)
  rect 1.5x2.5 smd: 11(-6.8,3.7) 12(8.7,3.7)
  rect 2x1.6 smd: 13(8,13.3)
  round 1 hole 1 unplated: 14(4,3.3) 15(-4,3.3)
  silkscreen extent -6.6,-0.8 8.5,14.1
TO-252-2_L6.6-W6.1-P4.57-LS9.9-TL-CW_1 [mm]
  rect 2.8x1.3 smd: 1(-3.292,2.273) 3(-3.292,-2.273)
  rect 6.5x6 smd: 2(3.292,0)
  silkscreen extent -4.26,-3.35 4.51,3.34
TSOT-23-5_L2.9-W1.6-P0.95-LS2.8-BL [mm]
  rect 0.532x1.045 smd: 1(-0.95,-1.147) 2(0,-1.147) 3(0.95,-1.147) 4(0.95,1.147) 5(-0.95,1.147)
  silkscreen extent -1.82,-1.45 1.55,0.9
WH-QFN-28_5X5X05P_9JR [mm]
  rect 0.3x0.875 smd: 1(-1.5,-2.538) 2(-1,-2.538) 3(-0.5,-2.538) 4(0,-2.538) 5(0.5,-2.538) 6(1,-2.538) 7(1.5,-2.538) 15(1.5,2.538) 16(1,2.538) 17(0.5,2.538) 18(0,2.538) 19(-0.5,2.538) 20(-1,2.538) 21(-1.5,2.538)
  rect 0.875x0.3 smd: 8(2.538,-1.5) 9(2.538,-1) 10(2.538,-0.5) 11(2.538,0) 12(2.538,0.5) 13(2.538,1) 14(2.538,1.5) 22(-2.538,1.5) 23(-2.538,1) 24(-2.538,0.5) 25(-2.538,0) 26(-2.538,-0.5) 27(-2.538,-1) 28(-2.538,-1.5)
  rrect0% 2.85x2.85 smd: 29(0,0)
  Top pour cut-out: -2.1,2.1 2.1,2.1 2.1,-2.1 -2.1,-2.1
  silkscreen extent -6,-6 6,6
WH-SOD-123 [mil]
  rect 63x27.5 smd: 1(-69.5,0) 2(69.5,0)
  silkscreen extent -28,-24 28,24
Z-506B [mm]
  oval 3.4x1.6 hole 0.8 slot 2.6 at 0 deg: 1(-4.96,1.7) 2(-4.96,-1.7) 3(4.96,1.7) 4(4.96,-1.7)
  silkscreen extent -8,-3.36 8,3.36

## Via types
v1: diameter 32, hole 16, Top to Bottom, 363 vias
v2: diameter 40, hole 20, Top to Bottom, 281 vias

## Nets (pads, with @x,y where several pads share a name; then routed paths per layer and width w, separated by ;. In a path a pad name is that pad's centre, name@x,y a point inside that pad or via, vN(x,y) a via of type N, cw(c..) or ccw(c..) an arc to the next point about the centre after c; other vN are vias at no path point)
3V3: C22.1 C25.1 C28.1 C31.1 C36.2 C40.2 C41.2 C44.1 C51.2 C52.2 C53.2 C60.1 D12.5 D13.5 J6.4 J8.1 P1.1 R1.2 R2.2 R3.2 R4.2 R5.2 R6.2 R7.2 R8.2 R11.2 R12.2 R15.2 R16.2 R19.2 R20.2 R21.2 R23.2 R24.2 R25.2 R26.2 R37.1 R44.1 R49.2 R50.2 R52.2 R54.2 R56.2 R57.2 R59.2 R63.2 R66.2 TF1.4 U1.9 U1.10 U1.15 U2.9 U2.10 U2.15 U3.9 U3.10 U3.15 U4.9 U4.10 U4.15 U6.16 U7.2 U7.4 U10.1 U10.13 U10.19 U10.32 U10.48 U10.64 U11.4 U12.5 U13.5 | length 20809.5
  Top w10: v1(40,1550) 40,1492.5 110,1422.5 R26.2@110,1420 ; R8.2@2290,1740 2300,1740 v1(2300,1810) ; C52.2@2480,820 2481,820 2520,859 v1(2520,860) ; C36.2@2570,1370 2600,1370 v2(2630,1340) 2652.36,1317.64 U10.64@2652.36,1285.91 ; R63.2@2780,359.68 2730.32,359.68 v2(2650,440) 2677.54,440 2700,417.54 2753.18,417.54 2773.71,397.01 2903.81,397.01 2935.38,365.45 2935.38,361.42 2960.05,336.75 2974.72,336.75 U12.5@2974.72,340 ; v1(2890,2320) 3040,2320 3059.37,2339.37 J6.4@3158.07,2339.37 ; v1(3030,1540) R2.2@3030,1590.32 ; R1.2@3040,1720.32 3040,1699.48 3059.74,1679.74 v1(3060,1680) ; v1(3100,1550) R3.2@3100,1590.32 ; R4.2@3100,1720.32 3105.91,1720.32 3123.53,1702.7 3123.53,1683.53 v1(3120,1680) ; J6.4@3149.51,2339.37 J6.4@3158.07,2339.37 ; v1(3170,2080) 3170,2078.78 3208.78,2040 3209.77,2040 3210,2040.23 3210.23,2040 3234.97,2040 3260,2065.03 D12.5@3260,2074.76 ; R50.2@3180,359.68 3185.91,359.68 3205.59,340 U13.5@3284.72,340 3284.72,336.75 3299.39,336.75 3315.43,352.79 3315.43,394.57 3310,400 ; U6.16@3201.89,1405 3270,1405 3290,1425 v1(3290,1570) ; D13.5@3260,2354.76 D13.5@3260,2344.13 ; v1(3270,2310) 3260,2320 D13.5@3260,2344.13 ; v2(3280,400) 3310,400 ; TF1.4@3385.83,2348.43 3458.43,2348.43 v1(3460,2350) ; R52.2@3490,359.68 3483.63,359.68 3464.78,380.53 3463.63,381.68 3415.2,381.68 3396.87,400 3310,400 ; 3640,1390 3644.49,1394.49 3670.08,1394.49 3699.68,1424.09 R25.2@3699.68,1430 ; J6.4@3158.07,2339.37 3177.64,2339.37 3197.01,2320 3235.87,2320 D13.5@3260,2344.13
  Top w12: R5.2@80,1780 80,1776.07 55.26,1755.26 50,1750 50,1620 v1(60,1610) 70,1600 106.49,1600 168.49,1538 278.53,1538 290.53,1550 356.19,1550 387.19,1519 420,1519 ; v2(400,1810) 406.14,1825.51 450.63,1870 ; 450.63,1900.1 450.63,1870 ; 470.32,1905.51 470.32,1870.87 469.44,1870 450.63,1870 ; 584.49,1940.94 584.49,1909.28 590,1903.76 590,1890 ; R6.2@820,1740 792,1712 792,1598.03 820.03,1570 880,1570 910,1600 930,1600 980,1550 950,1520 ; v1(1040,1770) 1120,1850 1150,1850 1170.63,1870.63 ; 1170.63,1900.1 1170.63,1870.63 ; 1190.32,1900.1 1190.32,1870.87 1189.44,1870 1171.26,1870 1170.63,1870.63 ; 1309.9,1940.94 1309.9,1913.86 1320,1903.76 1320,1890 ; R7.2@1540,1740 1540,1741.46 1609.27,1810.73 v1(1610,1810) ; v1(1830,1840) 1870.63,1840 1890.63,1860 ; 1890.63,1900.1 1890.63,1860 ; 1910.32,1900.1 1910.32,1860.31 1910,1860 1890.63,1860 ; 2034.49,1940.94 2040,1940.94 2040,1900 ; v2(2460,910) 2462.63,907.37 2526.67,971.42 U10.13@2574.09,971.42 ; v2(2520,1250) 2531.73,1250 U10.1@2574.09,1207.64 ; 2520,1590 2510,1590 2490,1610 2490,1672.5 2517.5,1700 R21.2@2520,1700 2520,1749.37 2550.32,1779.68 v1(2550,1780) 2610.63,1840.63 2610.63,1860 ; 2610.63,1900.1 2610.63,1860 ; 2630.32,1900.1 2630.32,1861.68 2628.63,1860 2610.63,1860 ; C53.2@2660,650 2661,650 2691.73,680.73 U10.19@2691.73,834.09 ; 2749.9,1940.94 2749.9,1920 2772,1897.9 2772,1888 ; U10.32@2947.64,834.09 2975.87,834.09 2981.77,840 C51.2@3020,840 ; U10.48@3025.91,1207.64 3025.91,1225.64 3040.34,1240.08 3041.08,1240.08 3080,1279 C41.2@3080,1280
  Top w15: R54.2@3610,359.68 3610,420
  Top w20: 420,1519 R11.2@420,1650 423,1650 477,1710 R12.2@480,1710 C22.1@540,1710 542.94,1710 v2(570,1750) 595.46,1775.46 595.46,1884.54 590,1890 ; R15.2@1160,1640 R15.2@1162.5,1640 ; 1240,1500 1240,1562.5 R15.2@1162.5,1640 ; v1(1290,1760) 1280,1750 1280,1746.53 ; 1320,1890 1322,1888 1322,1788.53 1280,1746.53 ; 1770,1570 R66.2@1770,1640 ; 1890,1590 R19.2@1890,1640 1893,1640 1947,1700 R20.2@1950,1700 C28.1@2010,1700 2010,1738.37 2042,1770.37 2042,1898 2040,1900 ; R59.2@2160,290 2164.12,290 2165,290 2165,325 2190,350 2222.14,350 2262.14,390 2504.63,390 2524.63,410 2620,410 v2(2650,440) ; 2520,1590 2587.5,1590 2637.5,1640 R23.2@2640,1640 2643,1640 2697,1700 R24.2@2700,1700 C31.1@2760,1700 2761,1700 2772,1711 2772,1888 ; R49.2@2550,630 2610,630 2610,620 ; R23.2@2640,1630.37 2640,1590 v2(2750,1480) ; v2(2970,420) 3193.9,420 3213.9,400 v2(3280,400) ; 2970,890 2971,890 3020,841 C51.2@3020,840 ; C41.2@3080,1279 3080,1246.13 3078,1244.13 v2@3078,1218 ; v1(3190,1360) 3201.89,1371.89 U6.16@3201.89,1405 ; R37.1@3410,1190 3450,1190 3460,1180 v2(3460,1160) 3471.75,1148.25 3471.75,1069.17 U11.4@3435.18,1032.6 3420,1032.6 R44.1@3420,960 ; v2(3440,1290) 3330,1290 v1(3310,1270) 3230,1190 3104.75,1190 v2@3078,1216.75 ; v2(3450,430) 3448.97,430 3458.97,420 3610,420 v2(3670,420) 3676.23,420 3720.32,375.91 R56.2@3720.32,370 ; P1.1@3588.58,1338.58 3640,1390 3667.73,1390 3677.73,1400 3678.53,1400 3699.68,1421.15 R25.2@3699.68,1424.09 ; v2(3760,430) 3786.23,430 3840.32,375.91 R57.2@3840.32,370 ; R15.2@1162.5,1640 1163,1640 1217,1700 R16.2@1220,1700 C25.1@1280,1700 1280,1746.53 ; v2@3078,1216.75 v2(3080,1220) v2@3078,1218 ; v2@3078,1216.75 v2@3078,1218
  Top w28: 2610,620 2610.14,619.86 2628.86,619.86 2659,650 C53.2@2660,650
  Top w30: v2(3440,1290) 3492.2,1290 3540.78,1338.58 P1.1@3588.58,1338.58
  Top w40: 420,1519 702,1519 703,1520 v2(750,1520) ; v2(900,1520) 950,1520 961.69,1520 1001.69,1560 1129.75,1560 1189.75,1500 1240,1500 1420,1500 v2(1440,1520) ; C60.1@1388.63,1370 1439.81,1370 1495.74,1314.07 1495.74,1243.37 1524.5,1214.62 1524.5,1192.47 1601.69,1115.28 1640,1115.28 U7.4@1640,1128 1620,1128 1620,1281.69 1640,1301.69 U7.2@1640,1350.35 ; U7.2@1640,1372 U7.2@1640,1350.35 ; v2(1640,1570) v2(1720,1570) 1770,1570 1870,1570 1890,1590 1960.62,1590 2020.62,1530 v2(2220,1530) ; v2@1713.57,1300 v2@1712.76,1300 ; C44.1@1840,1180.63 1835.99,1180.63 1835.99,1176.61 1780,1232.6 1780,1232.76 v2@1712.76,1300 ; J8.1@2092.13,141.73 2092.13,211.4 2164.12,283.38 R59.2@2164.12,290 ; v2(2380,1410) 2379.37,1409.37 C40.2@2379.37,1350 2439.37,1290 2474.95,1290 2517.47,1247.47 v2(2520,1250) ; v2(2520,520) 2569.77,520 2610,560.23 2610,620 ; 2610,630 v2(2610,740) ; v2(2730,920) 2730,930 2830,1030 ; v2(2870,1160) 2860,1170 v2(2770,1170) v2(2680,1170) 2820,1030 2830,1030 ; 2970,890 2964.95,890 2860,994.95 2858.76,994.95 2830,1023.71 2830,1030 ; U7.2@1640,1350.35 1690.35,1300 v2(1710,1300) v2@1712.76,1300
  Bottom w10: v1(40,1550) 60,1570 v1(60,1610) ; v1(1830,1840) 1870,1840 1900,1870 v1(2040,1870) ; v1(2300,1810) 2330,1840 2490,1840 v1(2550,1780) ; v1(2890,2320) 2890,2300 2870,2280 2870,2100 3070,1900 v1@3070,1680 ; v1(3030,1540) 3060,1540 3070,1550 ; v1(3120,1680) v1@3070,1680 ; v1(3170,2080) 3220,2130 3260,2130 3300,2170 3300,2280 v1(3270,2310) 3345,2310 3385,2350 v1(3460,2350) ; v1(3290,1570) 3200,1570 3180,1550 v1(3100,1550) 3070,1550 ; 3070,1550 v1@3070,1670 ; v1@3070,1670 v1(3060,1680) v1@3070,1680 ; v1@3070,1670 v1@3070,1680
  Bottom w12: v1(1610,1810) 1610,1820 1716.63,1820 1736.63,1840 v1(1830,1840)
  Bottom w20: v2(400,1810) 460,1750 v2(570,1750) ; v1(1040,1770) 1090,1720 1191.63,1720 1231.63,1760 v1(1290,1760) ; v2(2520,520) 2590,450 2640,450 v2(2650,440) 2691.73,398.27 2691.73,383.02 2734.75,340 2760,340 2840,420 v2(2970,420) ; v2(2520,1250) 2565,1295 2585,1295 v2(2630,1340) ; v2(2870,1160) 2915.23,1160 2975.23,1220 v2(3080,1220) ; v1(3190,1360) 3222,1360 3287.37,1294.63 3287.37,1292.63 v1(3310,1270) ; v2(3280,400) 3310,430 v2(3450,430) ; v2(3440,1290) 3440,1269.63 3460,1249.63 v2(3460,1160) ; v2(3670,420) 3680,430 v2(3760,430)
  Bottom w40: v2(750,1520) 782.53,1552.53 867.47,1552.53 v2(900,1520) ; v2(1440,1520) 1490,1570 v2(1640,1570) ; v2(1710,1300) 1710,1430 1720,1440 v2(1720,1570) ; v2(2220,1530) 2310,1530 2380,1460 v2(2380,1410) ; v2(2460,910) v1(2520,860) 2610,860 ; v2(2520,1250) 2600,1170 v2(2680,1170) ; v2(2610,740) 2610,860 ; v2(2730,920) 2670,920 2610,860 ; v2(2750,1480) 2740,1480 2740,1331.58 2770,1301.58 v2(2770,1170)
5V: BL_T.4 C38.1 C39.2 C47.1 F1.2 P2.10 R36.1 U7.3 U8.20 | length 5705.8
  Top w12: v2(2130,1110) 2135.16,1145.16 U8.20@2135.16,1167.8
  Top w40: F1.2@1178.66,1140 1178.66,1153.19 1225.47,1200 1307.4,1200 C38.1@1362.2,1145.2 ; C38.1@1359.37,1140 C38.1@1359.37,1141.18 ; v2(1380,1260) 1379.61,1259.61 C39.2@1449.22,1190 ; C39.2@1450,1190 C39.2@1449.22,1190 ; U7.3@1549.45,1372 1549.45,1368 1549.45,1260 v2(1550,1260) ; v2(1670,1250) 1690,1250 1760,1180 1760,1173.86 1813.86,1120 v2(1830,1120) ; v2(2100,910) 2090,890 2090,816.45 2126,780.45 2126,524.6 2216.64,433.96 2348.01,433.96 2368,453.96 2368,457.4 2392.6,482 2472,482 2480,474 2588.82,474 2680,565.18 v2(2680,570) ; R36.1@2210,1290 v2(2210,1240) 2217.63,1240 2217.63,1190 C47.1@2230,1190 ; v2(2900,620) 2950,620 2990,660 3090,660 3155.51,594.49 BL_T.4@3155.51,584.65 3155.51,574.8 3213.01,517.31 3690.64,517.31 3806.01,632.68 P2.10@3811.81,632.68 3821.65,632.68 3906.15,717.17 3906.15,1054.95 3761.1,1200 v2(3510,1200) ; v2(3520,1570) 3528.24,1570 3528.24,1610 3530.5,1610 ; C38.1@1359.37,1141.18 1358.18,1141.18 C38.1@1359.37,1142.37 ; C38.1@1359.37,1141.18 C38.1@1359.37,1142.37 ; C38.1@1359.37,1142.37 1359.37,1144.01 C38.1@1361.01,1144.01 ; C38.1@1359.37,1142.37 C38.1@1361.01,1144.01 ; C38.1@1361.01,1144.01 1363.39,1144.01 C38.1@1362.2,1145.2 ; C38.1@1361.01,1144.01 C38.1@1362.2,1145.2 ; C38.1@1362.2,1145.2 1407,1190 C39.2@1449.22,1190
  Bottom w40: v2(1380,1260) 1380,1250 1494,1250 1504,1260 v2(1550,1260) 1596,1260 1606,1250 v2(1670,1250) ; v2(1830,1120) 1888.3,1120 1928.3,1160 2033,1160 2083,1110 v2(2130,1110) ; v2(2100,910) 2100,970 2078,992 2078,1058 v2(2130,1110) ; v2(2210,1240) 2130,1160 v2(2130,1110) ; v2(2680,570) 2733.3,570 2783.3,620 v2(2900,620) ; v2(3510,1200) 3510,1560 v2(3520,1570)
5VOUT: C46.1 F1.1 L1.2 R31.2 | length 704.2
  Top w10: R31.2@630,1440 630,1437.72 630.22,1437.72 653,1414.94 653,1408.82 701.82,1360 710,1360 788.98,1281.02 L1.2@890,1281.02
  Top w40: L1.2@890,1281.02 L1.2@934.55,1281.02 ; C46.1@939.37,1390 L1.2@939.37,1285.84 ; F1.1@1061.34,1140 1061.86,1140 1061.86,1174.51 944.95,1291.42 L1.2@939.37,1285.84 ; L1.2@934.55,1281.02 939.37,1281.02 L1.2@939.37,1285.84 ; L1.2@934.55,1281.02 L1.2@939.37,1285.84